# EAGLE board PRECISION_CLOCK (EAGLE 9.6.2)

Size 125.02 x 30.28 mm. Coordinates in mm from the lower left corner, seen from the top.
Outline: 0,30.28 0,0 125.02,0 124.99,30.18 0,30.28
Copper layers (1*16): Top 0.035mm / dielectric 1.5mm / Bottom 0.035mm
Design rules "default": minimum track width 6mil, minimum drill 0.35mm, track to track 6mil, track to pad 6mil, pad to pad 6mil, via to via 6mil, smd to smd 6mil, copper to edge 40mil, drill to drill 6mil, minimum pad ring 10mil, minimum via ring 8mil, stop-mask expansion 4mil, vias tented up to drill 0mil, thermal gap 10mil

## Footprints (pad centres in the part's own frame; a part is rotated, then mirrored left to right if it is on the bottom)
BH-44A-5 = smd 4.04 x 2.3: P$1 -8.169,0.015 | smd 4.35 x 2.3: P$2 7.79,-0.003
153CLV-0505 = smd 3 x 1.6: + 2.2,0; - -2.2,0
C0805 = smd 1.3 x 1.5: 1 -0.95,0; 2 0.95,0
SOT223 = smd 1.499 x 2.007: 1 -2.261,-3.15; 2 0.025,-3.15; 3 2.311,-3.15 | smd 3.81 x 2.007: 4 0,3.15
GCT_USB4110-GF-A_REVB = smd 0.6 x 1.15: A1/B12 -3.2,1.075; A4/B9 -2.4,1.075; B1/A12 3.2,1.075; B4/A9 2.4,1.075 | smd 0.3 x 1.15: A5 -1.25,1.075; A6 -0.25,1.075; A7 0.25,1.075; A8 1.25,1.075; B5 1.75,1.075; B6 0.75,1.075; B7 -0.75,1.075; B8 -1.75,1.075 | smd 2.18 x 2: S1 -5.11,0.5; S2 5.11,0.5; S3 -5.11,-3.43; S4 5.11,-3.43 | hole 0.65: -2.89,0; 2.89,0
SML0805 = smd 1.2 x 1.2: A 1.05,0; C -1.05,0
W237-102 = drill 1.194 long: 1 -2.5,-1.27; 2 2.5,-1.27
NX3225 = smd 1.4 x 1.2: 1 -1.1,-0.8; 2 1.1,-0.8; 3 1.1,0.8; 4 -1.1,0.8
R0805 = smd 1.3 x 1.5: 1 -0.95,0; 2 0.95,0
KSS-2EG4430 = smd 1.6 x 1.4: 1 -3.75,0; 2 3.75,0
32A_ATM = smd 1.473 x 0.508: 1 -4.242,2.8; 2 -4.242,2; 3 -4.242,1.2; 4 -4.242,0.4; 5 -4.242,-0.4; 6 -4.242,-1.2; 7 -4.242,-2; 8 -4.242,-2.8; 17 4.242,-2.8; 18 4.242,-2; 19 4.242,-1.2; 20 4.242,-0.4; 21 4.242,0.4; 22 4.242,1.2; 23 4.242,2; 24 4.242,2.8 | smd 0.508 x 1.473: 9 -2.8,-4.242; 10 -2,-4.242; 11 -1.2,-4.242; 12 -0.4,-4.242; 13 0.4,-4.242; 14 1.2,-4.242; 15 2,-4.242; 16 2.8,-4.242; 25 2.8,4.242; 26 2,4.242; 27 1.2,4.242; 28 0.4,4.242; 29 -0.4,4.242; 30 -1.2,4.242; 31 -2,4.242; 32 -2.8,4.242
21-0041B_8_MXM = smd 1.46 x 0.533: 1 -2.724,1.905; 2 -2.724,0.635; 3 -2.724,-0.635; 4 -2.724,-1.905; 5 2.724,-1.905; 6 2.724,-0.635; 7 2.724,0.635; 8 2.724,1.905
VFQFPN-16_STM = smd 0.813 x 0.254: 1 -1.473,0.75; 2 -1.473,0.25; 3 -1.473,-0.25; 4 -1.473,-0.75; 9 1.473,-0.75; 10 1.473,-0.25; 11 1.473,0.25; 12 1.473,0.75 | smd 0.254 x 0.813: 5 -0.75,-1.473; 6 -0.25,-1.473; 7 0.25,-1.473; 8 0.75,-1.473; 13 0.75,1.473; 14 0.25,1.473; 15 -0.25,1.473; 16 -0.75,1.473 | smd 1.753 x 1.753: 17 0,0
DISPLAY-OLED-128X32 = drill 1 square: 1 -17.78,-3.81 | drill 1: 2 -17.78,-1.27; 3 -17.78,1.27; 4 -17.78,3.81
PEC11S-9220K = smd 1.3 x 2.4: P$A -2.5,-7.3; P$B 0,-7.3; P$C 2.5,-7.3; P$D -2.5,7; P$E 2.5,7
MSOP10 = smd 1.513 x 0.33: 1 -2.045,1; 2 -2.045,0.5; 3 -2.045,0; 4 -2.045,-0.5; 5 -2.045,-1; 6 2.045,-1; 7 2.045,-0.5; 8 2.045,0; 9 2.045,0.5; 10 2.045,1

## Placement (x,y rotation side)
BT_CNN  CR1220  [BH-44A-5]  16.64,9.12 0 top
C1  [153CLV-0505]  30.3,4.9 90 top
C2  [C0805]  33.96,20.88 270 bottom
C3  [C0805]  60.1,22.07 270 bottom
C4  [153CLV-0505]  38.43,4.9 90 top
C5  [153CLV-0505]  19.13,23.44 90 top
C6  [C0805]  56.26,22.07 270 bottom
C7  [C0805]  46.18,28.37 0 bottom
C8  [C0805]  37.67,27 0 bottom
C9  4.7uF  [C0805]  28.27,6.68 0 bottom
C10  0.1uF  [C0805]  13.03,19.13 0 bottom
C13  22pF  [C0805]  73.63,7.01 135 bottom
C14  22pF  [C0805]  70.36,3.71 315 bottom
CR1  AMS1117  [SOT223]  27.41,23.47 0 top
J1  USB4110-GF-A_REVB  [GCT_USB4110-GF-A_REVB]  118.08,22.81 90 top
LED1  [SML0805]  43.26,26.24 180 top
LED4  [SML0805]  63.7,23.7 0 top
LED5  [SML0805]  63.7,19.76 0 top
LED_SYS  [SML0805]  65.1,9.22 90 top
PSU  PSU  [W237-102]  8.46,23.19 270 top
Q1  [NX3225]  69.65,7.7 315 bottom
R1  [R0805]  48.41,21.44 0 top
R2  [R0805]  65.1,4.39 90 top
R3  [R0805]  48.08,26.24 180 top
R4  [R0805]  38.68,13.54 180 top
R5  0.2  [R0805]  16.59,9.73 90 bottom
R6  0.2  [R0805]  17.09,19.13 90 bottom
R7  [R0805]  63.58,27.64 0 top
R8  [R0805]  67.77,27.64 0 top
R9  [R0805]  20.65,17.86 90 bottom
SW1  KSS-2EG4430  [KSS-2EG4430]  38.28,19.86 90 top
U2  ATMEGA328P-AU  [32A_ATM]  65.2,14.88 45 bottom
U3  DS3231  [21-0041B_8_MXM]  96.34,21.89 0 bottom
U4  STSPIN220  [VFQFPN-16_STM]  17.35,14.3 90 bottom
U$1  DISPLAY-OLED-128X32  [DISPLAY-OLED-128X32]  105.28,7.62 0 top
U$2  PEC11S-9220K  [PEC11S-9220K]  49.78,10.24 0 top
U$5  CH340E  [MSOP10]  108.23,25.86 0 top

## Library data of the parts
BT_CNN = CR1220
C1-C10 C13 C14 R1-R9 = resistor
CR1 = AMS1117
J1 = USB4110-GF-A_REVB; AVAILABILITY: In Stock; DESCRIPTION: USB-C (USB TYPE-C) USB 2.0 Receptacle Connector 24 (16+8 Dummy) Position Surface Mount, Right Angle; Through Hole; MF: GCT; MP: USB4110-GF-A; PACKAGE: None; PRICE: None; PURCHASE-URL: https://pricing.snapeda.com/search/part/USB4110-GF-A/?ref=eda
LED1 LED4 LED5 LED_SYS = led
PSU = con-wago-500; MPN: 237-102; OC_FARNELL: unknown; OC_NEWARK: 70K9898
Q1 = adafruit
SW1 = buttons
U2 = Atmega328P; BUILT_BY: EMA_UL_Team; MANUFACTURER_PART_NUMBER: ATMEGA328P-AU; SOURCELIBRARY: Atmel_2011-04-02; VENDOR: Atmel
U3 = DS3231; BUILT_BY: EMA_UL_Team; MANUFACTURER_PART_NUMBER: DS3231MZ/V+T; REVISION: 3; SOURCELIBRARY: Maxim_2014-04-30_1; VENDOR: Maxim Integrated Products
U4 = STSPIN220; BUILT_BY: EMA_Jessica; COPYRIGHT: Copyright (C) 2018 Accelerated Designs. All rights reserved; MANUFACTURER_PART_NUMBER: STSPIN220; SOURCELIBRARY: Update_to_database_2020-12-04; VENDOR: STMicroelectronics
U$1 = diy-modules
U$2 = PEC11S-9220K_ENCODER
U$5 = ch340E

## Nets
ENCODER_CLK: U2.2 U$2.P$A
ENCODER_DT: U2.32 U$2.P$B
ENCODER_SW: U2.1 U$2.P$D
GND: BT_CNN.P$1 C1.- C2.2 C3.2 C4.- C5.- C6.2 C8.2 C9.2 C10.2 C13.2 C14.2 CR1.1 J1.A1/B12 J1.B1/A12 J1.S1 J1.S2 J1.S3 J1.S4 PSU.2 Q1.2 Q1.4 R2.1 R3.1 R5.1 R6.1 SW1.1 U2.3 U2.5 U2.21 U3.5 U4.7 U4.17 U$1.1 U$2.P$C U$2.P$E U$5.3
I2C_SCL: U2.28 U3.8 U$1.3
I2C_SDA: U2.27 U3.7 U$1.4
LED_SYSTEM: LED_SYS.A U2.17
MCU_XI: C13.1 Q1.1 U2.7
MCU_XO: C14.1 Q1.3 U2.8
N$1: LED_SYS.C R2.2
N$2: R5.2 U4.4
N$3: LED1.C R3.2
N$4: R1.1 SW1.2
N$5: R6.2 U4.9
N$6: LED4.C R7.2
N$7: LED5.C R8.2
N$8: C8.1 U$5.10
RESET: C4.+ C7.2 R1.2 R4.1 U2.29 U3.4
RTC_VBAT: BT_CNN.P$2 U3.6
STP_DIR_MODE4: U2.12 U4.1
STP_ENABLE: U2.11 U4.13
STP_MODE1: U2.15 U4.16
STP_MODE2: U2.14 U4.15
STP_OUT_A1: U4.3
STP_OUT_A2: U4.5
STP_OUT_B1: U4.10
STP_OUT_B2: U4.8
STP_RESET: R9.1 U4.14
STP_STEP_MODE3: U2.13 U4.2
UART_DTR: C7.1 U$5.4
UART_RX: R8.1 U2.30 U$5.9
UART_TX: R7.1 U2.31 U$5.8
USB_D+: J1.A6 J1.B6 U$5.1
USB_D-: J1.A7 J1.B7 U$5.2
VBUS: J1.A4/B9 J1.B4/A9
VCC: C1.+ C2.1 C3.1 C6.1 C9.1 C10.1 CR1.2 J1.B5 LED1.A LED4.A LED5.A R4.2 R9.2 U2.4 U2.6 U2.18 U3.2 U4.6 U$1.2 U$5.7
VIN: C5.+ CR1.3 PSU.1
VREF: U2.20

## Tracks (layer width: path | path; a pad name or v marks a point on that pad's centre or on a via)
ENCODER_CLK  (1 unrouted)
ENCODER_DT  (1 unrouted)
ENCODER_SW  (1 unrouted)
GND  (36 unrouted)
I2C_SCL  (2 unrouted)
I2C_SDA  (2 unrouted)
LED_SYSTEM  (1 unrouted)
MCU_XI  (2 unrouted)
MCU_XO  (2 unrouted)
N$1  (1 unrouted)
N$2  (1 unrouted)
N$3  (1 unrouted)
N$4  (1 unrouted)
N$5  (1 unrouted)
N$6  (1 unrouted)
N$7  (1 unrouted)
N$8  (1 unrouted)
RESET  (5 unrouted)
RTC_VBAT  (1 unrouted)
STP_DIR_MODE4  (1 unrouted)
STP_ENABLE  (1 unrouted)
STP_MODE1  (1 unrouted)
STP_MODE2  (1 unrouted)
STP_RESET  (1 unrouted)
STP_STEP_MODE3  (1 unrouted)
UART_DTR  (1 unrouted)
UART_RX  (2 unrouted)
UART_TX  (2 unrouted)
USB_D+  (2 unrouted)
USB_D-  (2 unrouted)
VBUS  (1 unrouted)
VCC  (19 unrouted)
VIN  (2 unrouted)